# EAGLE board 4ButtonBreakout (EAGLE 6.5.0)
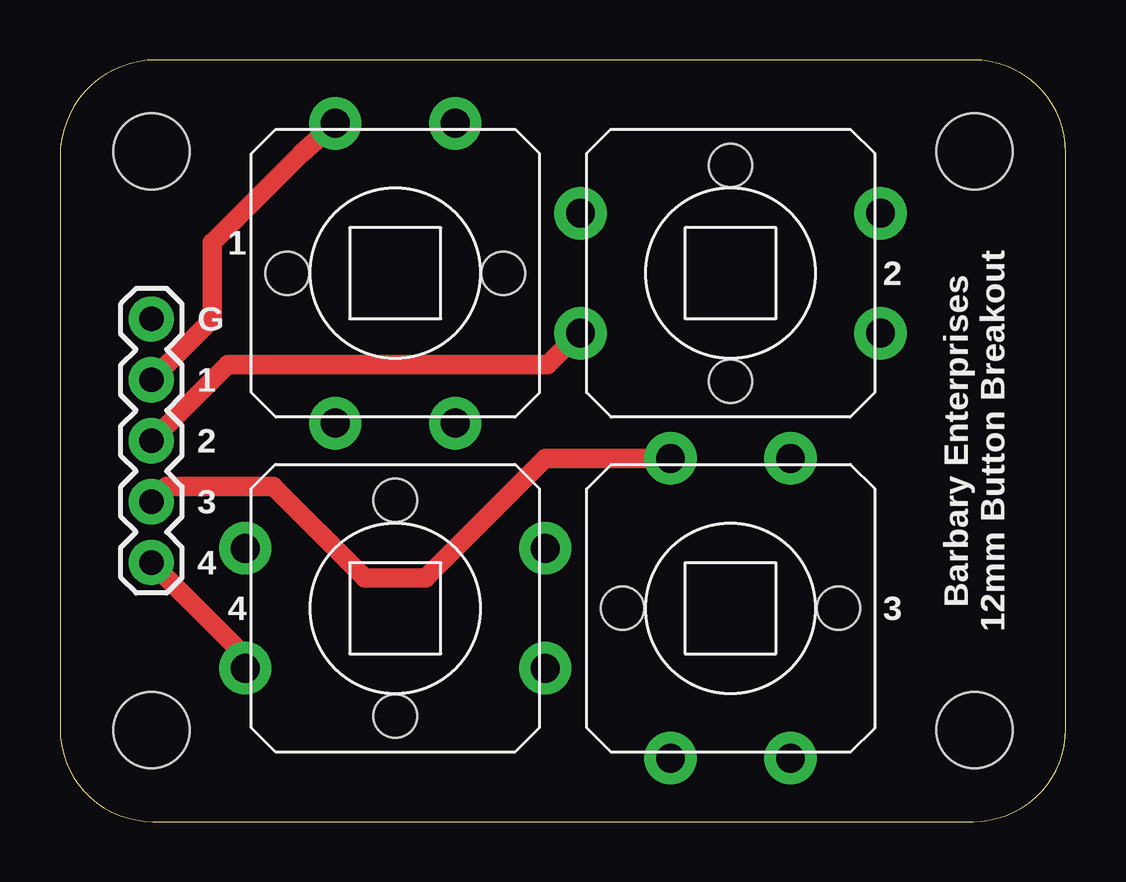
[diagram p0: board, top side]
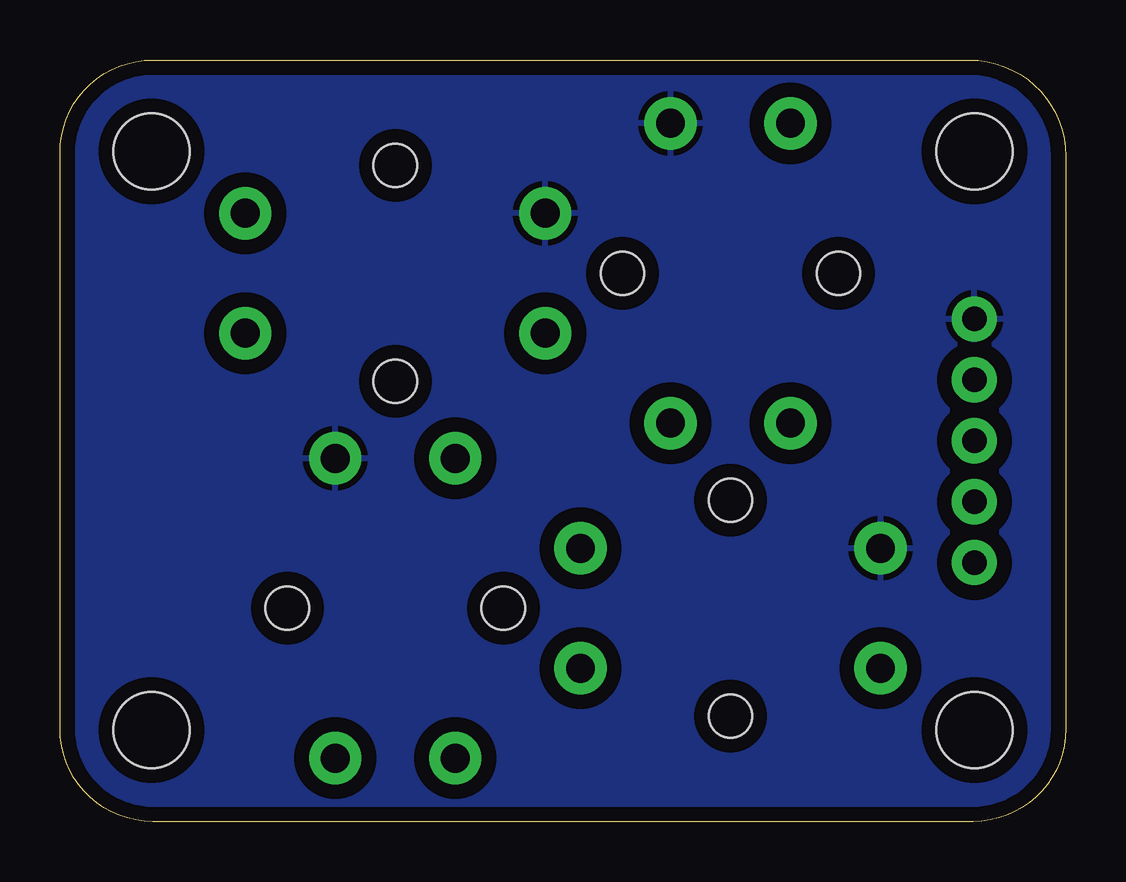
[diagram p1: board, bottom side, seen from below]

Size 41.91 x 31.75 mm. Coordinates in mm from the lower left corner, seen from the top.
Outline: 3.86,0 38.05,0 arc90 41.91,3.86 41.91,27.89 arc90 38.05,31.75 4.02,31.75 arc90 0,27.73 0,3.86 arc90 3.86,0
Copper layers (1*16): Top 0.0356mm / dielectric 1.5011mm / Bottom 0.0356mm
Design rules "LaenPCBOrder": minimum track width 6mil, minimum drill 13mil, track to track 6mil, track to pad 6mil, pad to pad 6mil, via to via 6mil, smd to smd 6mil, copper to edge 15mil, drill to drill 6mil, minimum pad ring 7mil, minimum via ring 7mil, stop-mask expansion 3mil, vias tented up to drill 0mil, thermal gap 10mil
Holes 3.17 mm at 3.81,3.81 38.1,3.81 38.1,27.94 3.81,27.94

## Footprints (pad centres in the part's own frame; a part is rotated, then mirrored left to right if it is on the bottom)
1X05 = drill 1.016 pad 1.88: 1 0,0; 2 2.54,0; 3 5.08,0; 4 7.62,0; 5 10.16,0
B3F_10 = drill 1.2 pad 2.184: 1 6.25,-2.5; 2 -6.25,-2.5; 3 6.25,2.5; 4 -6.25,2.5 | hole 1.8: 0,-4.5; 0,4.5

## Placement (x,y rotation side)
JP1  [1X05]  3.81,20.95 270 top
S1  [B3F_10]  13.97,8.89 0 top
S2  [B3F_10]  27.94,8.89 270 top
S3  [B3F_10]  27.94,22.86 0 top
S4  [B3F_10]  13.97,22.86 270 top

## Library data of the parts
JP1 = SparkFun-Connectors
S1-S4 = barbary_enterprises

## Nets
GND: JP1.1 S1.4 S2.4 S3.4 S4.4
N$1: JP1.5 S1.2
N$2: JP1.4 S2.2
N$3: JP1.3 S3.2
N$4: JP1.2 S4.2

## Tracks (layer width: path | path; a pad name or v marks a point on that pad's centre or on a via)
GND
  pour Bottom (isolate 0.61): 0,0 41.91,0 41.91,31.75 0,31.75
N$1
  Top 0.813: S1.2 7.62,6.39 | 7.58,6.39 7.62,6.39 | 7.62,6.39 7.62,6.99 JP1.5
N$2
  Top 0.813: S2.2 20.22,15.14 15.24,10.16 12.7,10.16 8.89,13.97 4.45,13.97 JP1.4
N$3
  Top 0.813: S3.2 21.63,20.36 20.32,19.05 6.99,19.05 JP1.3
N$4
  Top 0.813: S4.2 10.06,27.84 6.35,24.13 6.35,20.95 JP1.2

## Text on the board
tPlace: 1 | 2 | G | 1 | 2 | Barbary Enterprises / 12mm Button Breakout | 3 | 4 | 4 | 3